# EAGLE board PICkit (EAGLE 6.6.0)
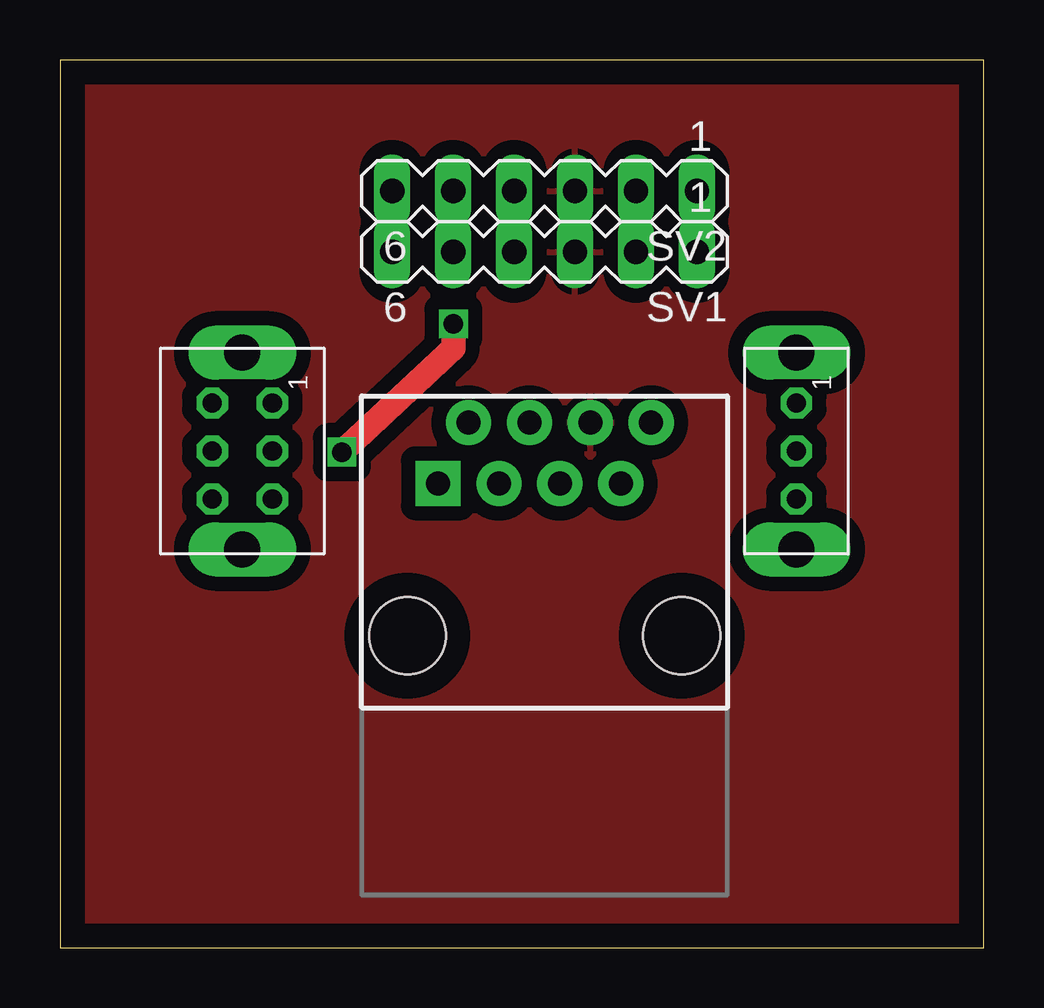
[diagram p0: board, top side]
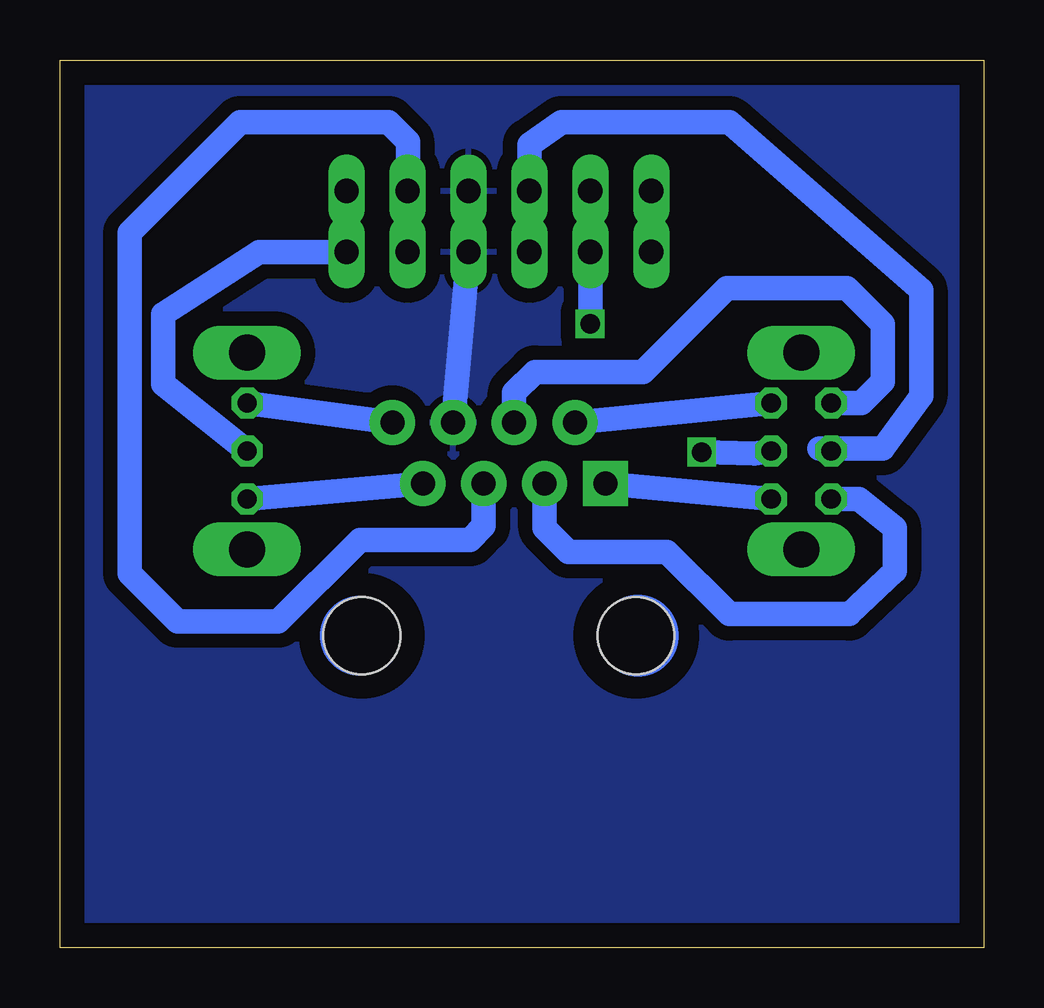
[diagram p1: board, bottom side, seen from below]

Size 38.5 x 37 mm. Coordinates in mm from the lower left corner, seen from the top.
Outline: 0,0 38.5,0 38.5,37 0,37 0,0
Copper layers (1*16): Top 0.035mm / dielectric 1.5mm / Bottom 0.035mm
Design rules "default": minimum track width 10mil, minimum drill 24mil, track to track 8mil, track to pad 8mil, pad to pad 8mil, via to via 8mil, smd to smd 8mil, copper to edge 40mil, drill to drill 8mil, minimum pad ring 10mil, minimum via ring 8mil, stop-mask expansion 4mil, vias tented up to drill 0mil, thermal gap 10mil

## Footprints (pad centres in the part's own frame; a part is rotated, then mirrored left to right if it is on the bottom)
RJ45-8 = drill 1 pad 1.88 square: 1 -4.445,6.35 | drill 1 pad 1.88: 2 -3.175,8.89; 3 -1.905,6.35; 4 -0.635,8.89; 5 0.635,6.35; 6 1.905,8.89; 7 3.175,6.35; 8 4.445,8.89 | hole 3.2: -5.715,0; 5.715,0
MA06-1 = drill 1.016 long: 1 -6.35,0; 2 -3.81,0; 3 -1.27,0; 4 1.27,0; 5 3.81,0; 6 6.35,0
SPDT-SWITCH = drill 0.8 octagon: P$1 -2,0; P$2 0,0; P$3 2,0 | drill 1.5 pad 1.8 long: P$7 4.1,0; P$8 -4.1,0
DPDT-SWITCH = drill 0.8 octagon: P$1 -2,1.25; P$2 0,1.25; P$3 2,1.25; P$4 -2,-1.25; P$5 0,-1.25; P$6 2,-1.25 | drill 1.5 pad 1.8 long: P$7 4.1,0; P$8 -4.1,0

## Placement (x,y rotation side)
JP1  RJ45  [RJ45-8]  20.2,13 0 top
SV1  [MA06-1]  20.2,29 180 top
SV2  [MA06-1]  20.2,31.54 180 top
U$1  SPDT_SWITCH  [SPDT-SWITCH]  30.7,20.7 270 top
U$2  DPDT_SWITCH  [DPDT-SWITCH]  7.6,20.7 270 top

## Library data of the parts
JP1 = SparkFun-Connectors; PROD_ID: CONN-08506
SV1 SV2 = con-lstb; OC_FARNELL: unknown; OC_NEWARK: unknown
U$1 U$2 = GFL_Micromouse

## Nets
GND: JP1.6 SV1.3 SV2.3
MCLR: SV1.1 SV2.1 U$1.P$2
MCLR1: JP1.7 U$1.P$3
MCLR2: JP1.8 U$1.P$1
N$1: SV1.6 SV2.6
PGC: SV1.5 SV2.5 U$2.P$2
PGC1: JP1.1 U$2.P$3
PGC2: JP1.2 U$2.P$1
PGD: SV1.4 SV2.4 U$2.P$5
PGD1: JP1.3 U$2.P$6
PGD2: JP1.4 U$2.P$4
VDD: JP1.5 SV1.2 SV2.2

## Tracks (layer width: path | path; a pad name or v marks a point on that pad's centre or on a via)
GND
  Bottom 1.016: JP1.6 SV1.3 SV2.3
  pour Bottom (isolate 0.6): 0.2,0 0.2,37 39,37 39,0
  pour Top (isolate 0.6): 0,0 0,37 38.6,37 38.6,0
MCLR
  Bottom 1.016: U$1.P$2 34.2,23.5 34.2,26.4 30.2,29 SV1.1 SV2.1
MCLR1
  Bottom 1.016: U$1.P$3 JP1.7
MCLR2
  Bottom 1.016: U$1.P$1 JP1.8
N$1
  Bottom 1.016: SV2.6 SV1.6
PGC  (via drill 0.8)
  Top 1.016: v11.75,20.65 16.4,25 v16.4,26
  Bottom 1.016: U$2.P$2 9.55,20.6 v11.75,20.65 | v16.4,26 16.39,26.21 SV1.5 SV2.5 16.4,31.6
PGC1
  Bottom 1.016: U$2.P$3 JP1.1
PGC2
  Bottom 1.016: U$2.P$1 JP1.2
PGD
  Bottom 1.016: SV2.4 SV1.4 18.93,33.47 17.6,34.4 10.6,34.4 2.6,27.4 2.6,23 4.2,20.8 6.85,20.8 U$2.P$5
PGD1
  Bottom 1.016: U$2.P$6 5.2,18.7 3.7,17.5 3.7,15.7 5.6,13.9 10.6,13.9 13.2,16.5 17.3,16.5 18.29,17.5 JP1.3
PGD2
  Bottom 1.016: JP1.4 19.56,23.13 18.7,24 14.2,24 10.7,27.5 5.7,27.5 4.2,26 4.2,23.6 5.1,22.7 U$2.P$4
VDD
  Bottom 1.016: SV1.2 SV2.2 24,33.6 24.8,34.4 31,34.4 35.6,29.8 35.6,15.6 33.6,13.6 29.4,13.6 26,17 21.4,17 20.84,17.57 JP1.5
(copper drawn outside any net)
  shapes: Bottom circle x2